# EAGLE board tc08n (EAGLE 6.6.0)
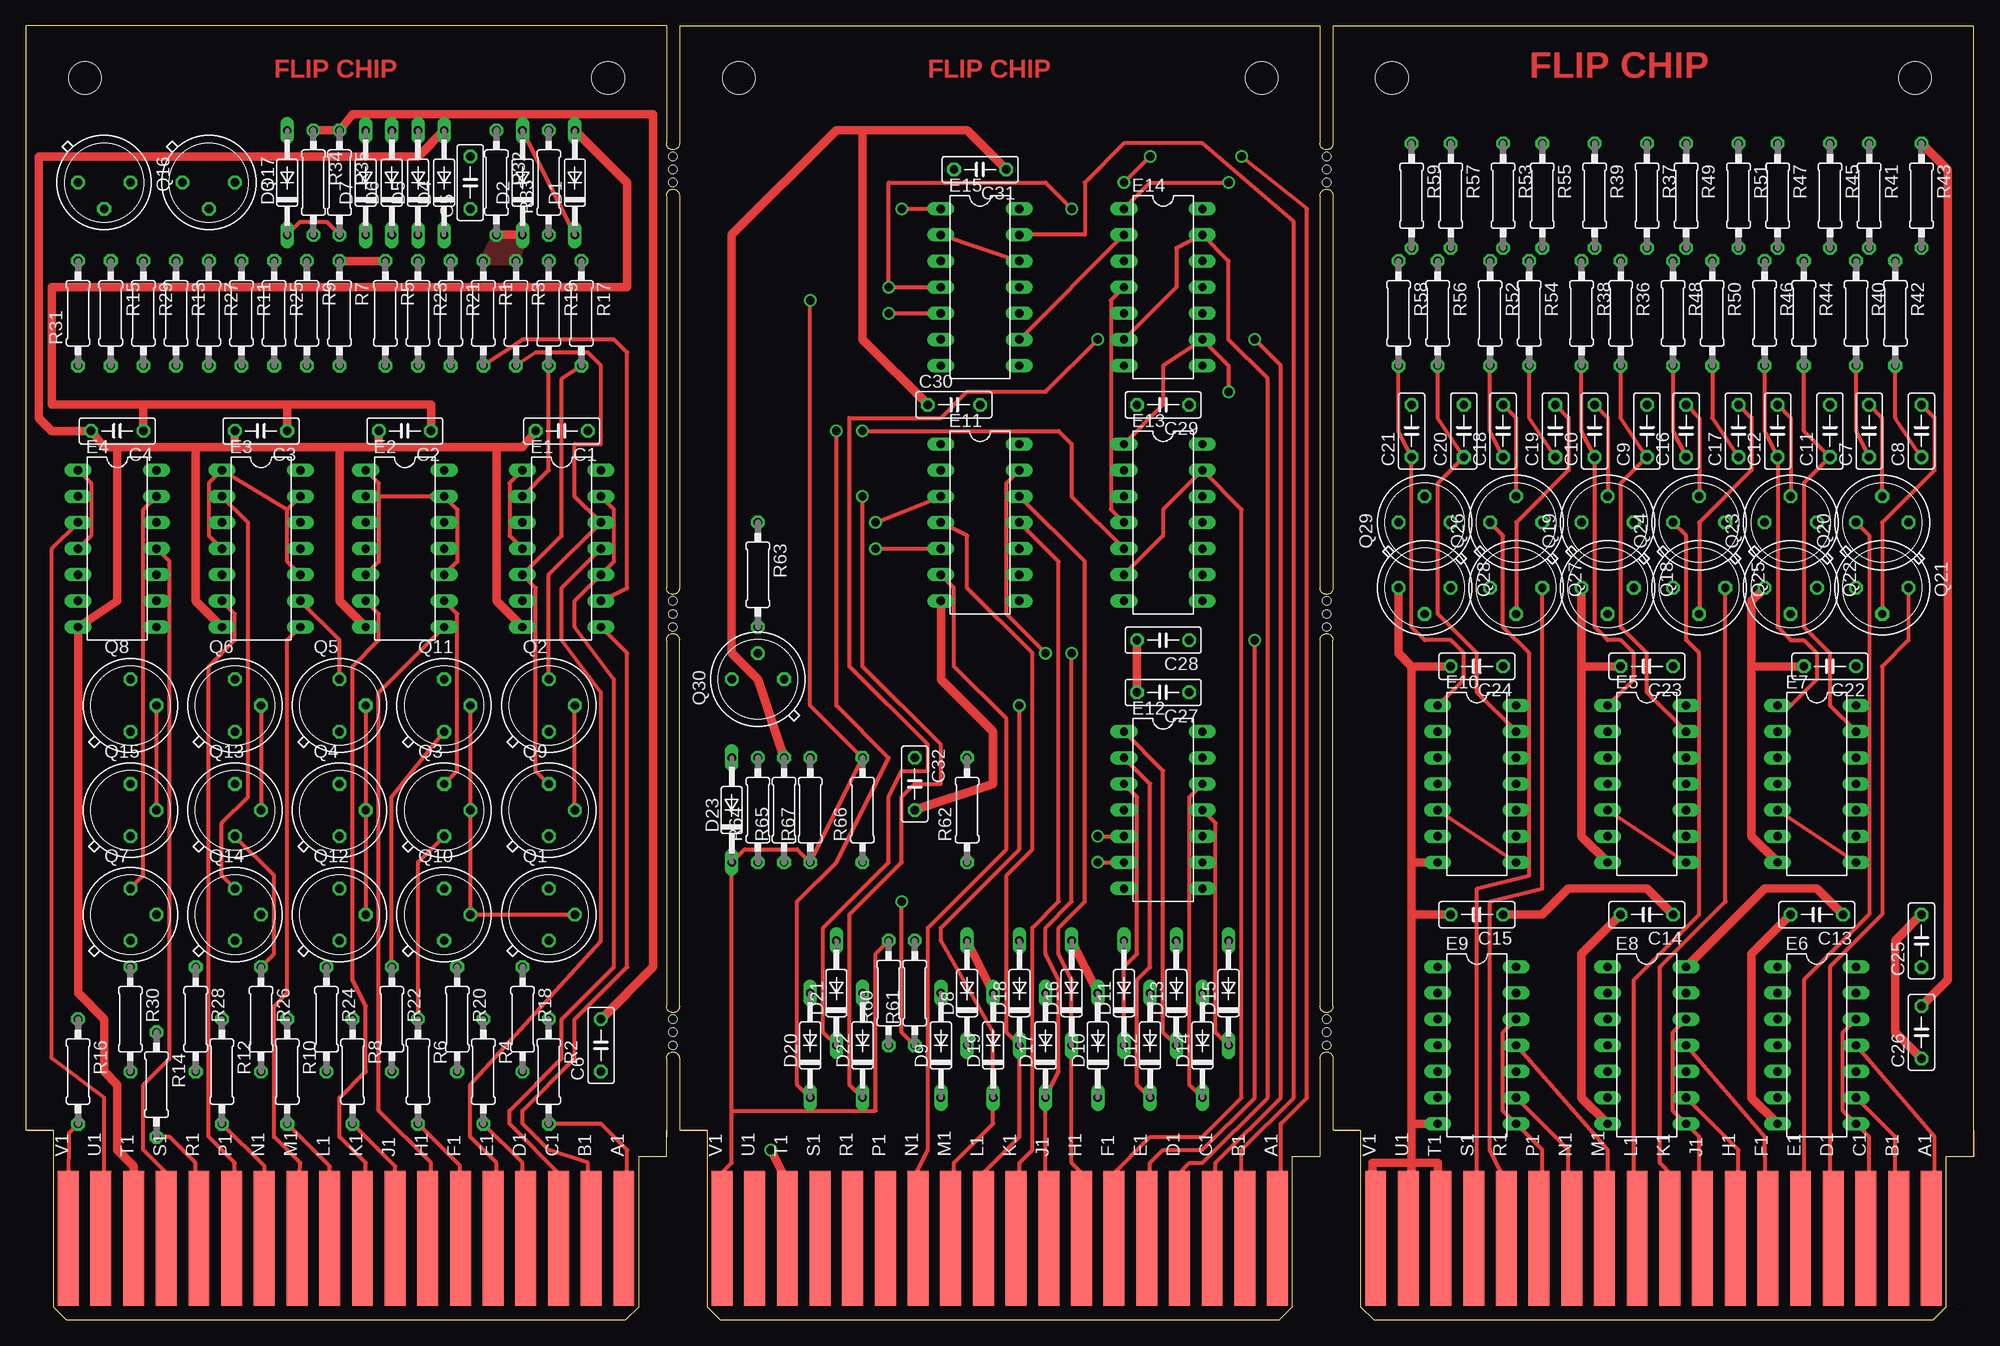
[diagram p0: board, top side]
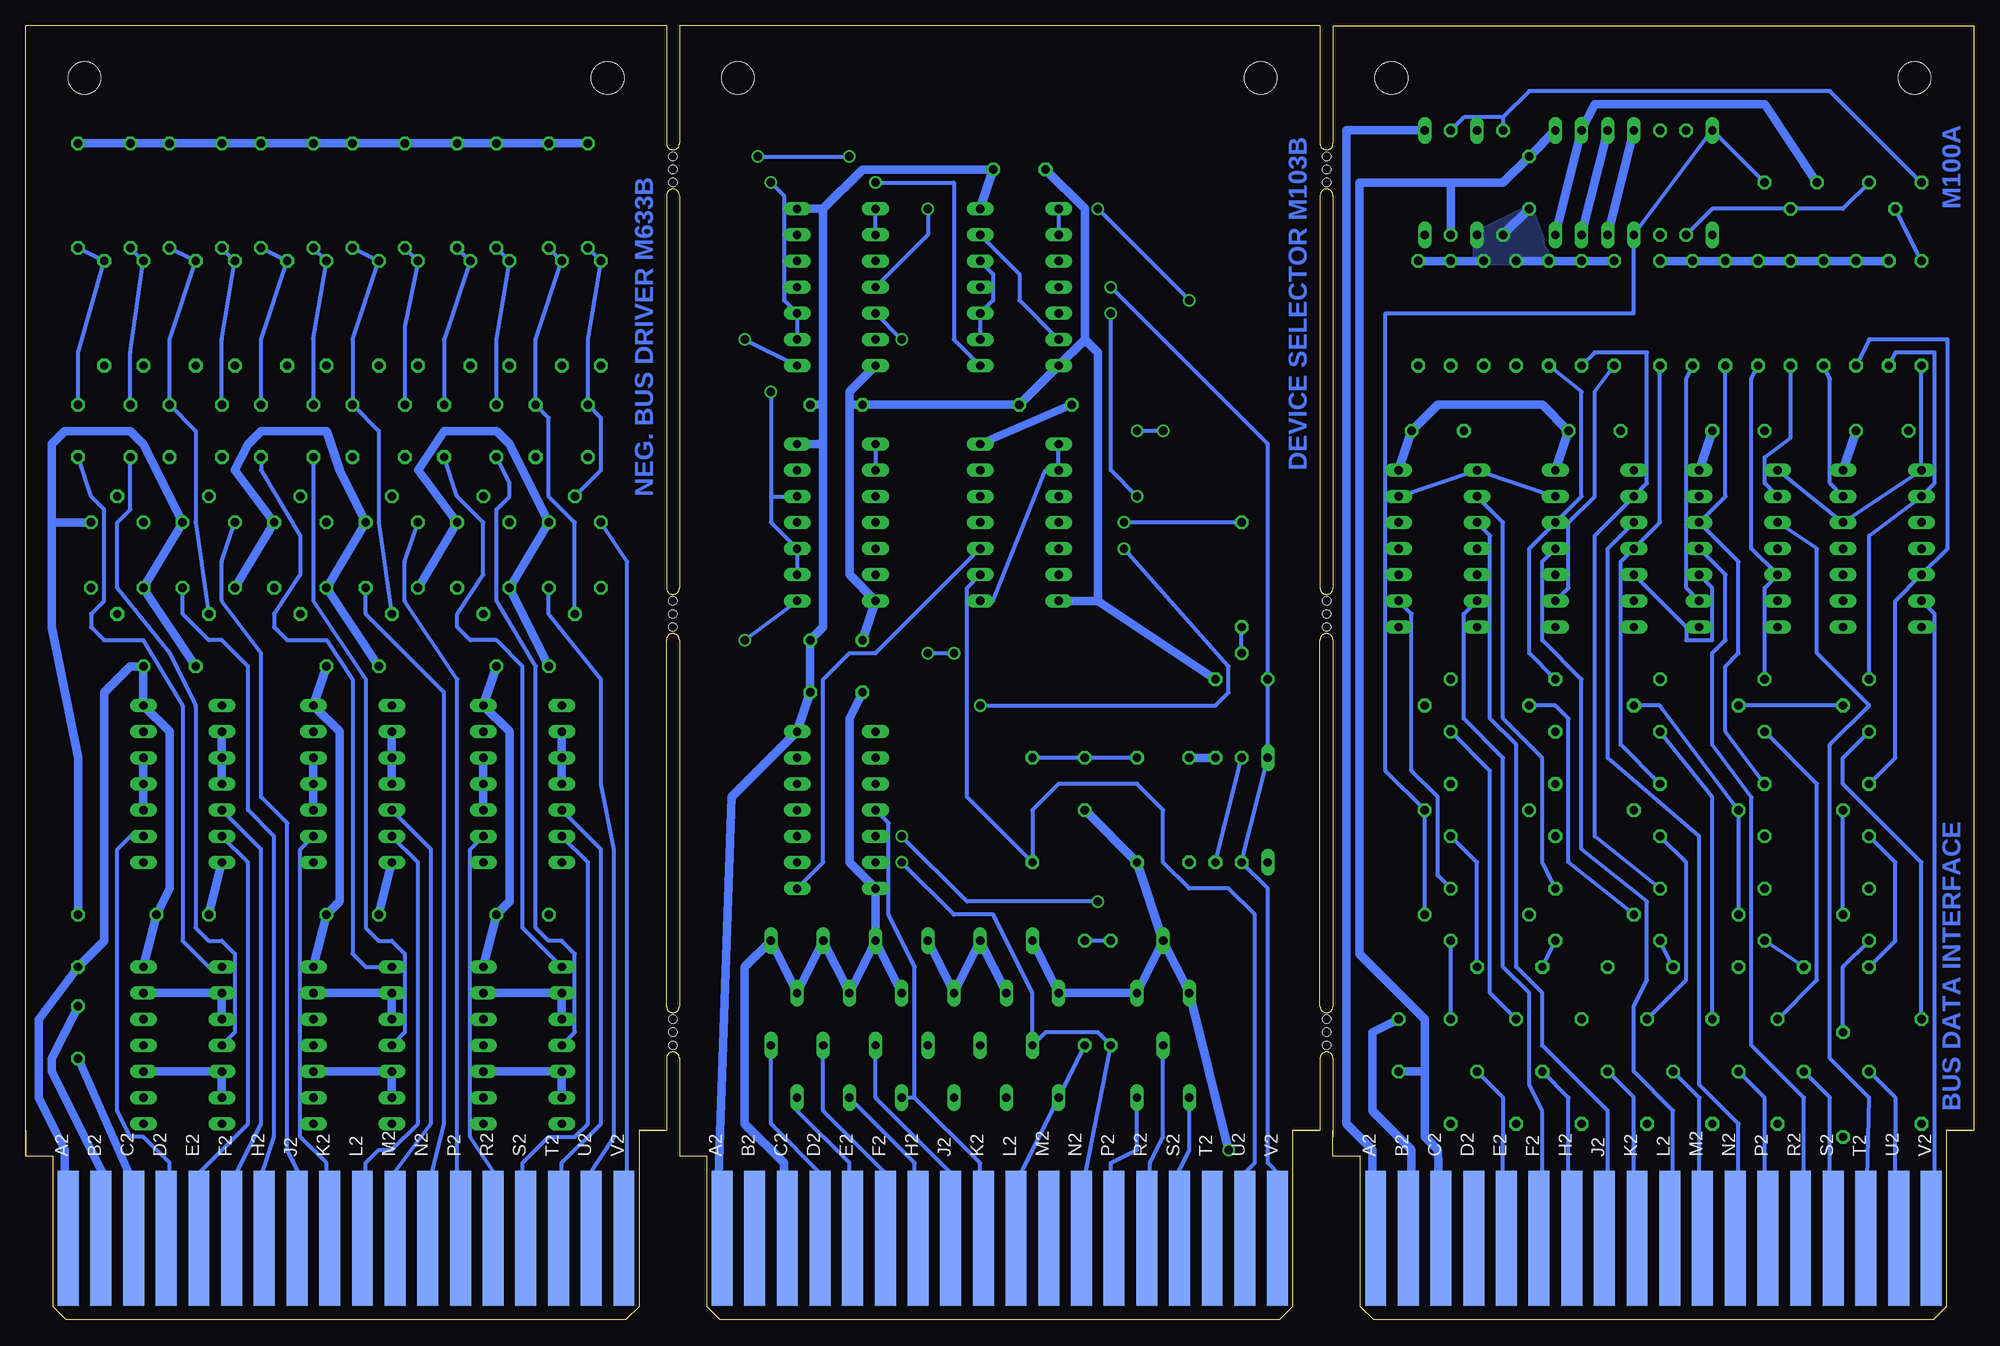
[diagram p1: board, bottom side, seen from below]

Size 189.23 x 125.73 mm. Coordinates in mm from the lower left corner, seen from the top.
Copper layers (1+16): Top 0.035mm / dielectric 1.5mm / Bottom 0.035mm
Design rules "16mils": minimum track width 16mil, minimum drill 32mil, track to track 15mil, track to pad 10mil, pad to pad 10mil, via to via 10mil, smd to smd 10mil, copper to edge 13mil, drill to drill 10mil, minimum pad ring 10mil, minimum via ring 8mil, stop-mask expansion 0mil, vias tented up to drill 0mil, thermal gap 10mil
Net classes: 1 Supply: width 0.813 mm

## Footprints (pad centres in the part's own frame; a part is rotated, then mirrored left to right if it is on the bottom)
C050-025X075 = drill 0.813 octagon: 1 -2.54,0; 2 2.54,0
DO35-10 = drill 0.813 long: A 5.08,0; C -5.08,0
DIL14 = drill 0.813 long: 1 -7.62,-3.81; 2 -5.08,-3.81; 3 -2.54,-3.81; 4 0,-3.81; 5 2.54,-3.81; 6 5.08,-3.81; 7 7.62,-3.81; 8 7.62,3.81; 9 5.08,3.81; 10 2.54,3.81; 11 0,3.81; 12 -2.54,3.81; 13 -5.08,3.81; 14 -7.62,3.81
DECPROTO = hole 3.175: 183.515,120.65; 132.715,120.65; 69.266,120.65; 120.066,120.65; 56.566,120.65; 5.766,120.65 | hole 0.813: 62.865,69.85; 62.865,68.58; 62.865,67.31; 62.865,26.67; 62.865,27.94; 62.865,29.21; 62.865,113.03; 62.865,110.49; 62.865,111.76; 126.365,69.85; 126.365,68.58; 126.365,67.31; 126.365,26.67; 126.365,27.94; 126.365,29.21; 126.365,113.03; 126.365,110.49; 126.365,111.76
TO5 = drill 0.813 octagon: 1 0,-2.54; 2 2.54,0; 3 0,2.54
TO39 = drill 0.813 octagon: 1 0,-2.54; 2 2.54,0; 3 0,2.54
0207/10 = drill 0.813 octagon: 1 -5.08,0; 2 5.08,0
EDGE-CON2 = smd 13.106 x 2.032: A1 7.938,4.128; B1 7.938,7.303; C1 7.938,10.477; D1 7.938,13.652; E1 7.938,16.828; F1 7.938,20.003; H1 7.938,23.177; J1 7.938,26.352; K1 7.938,29.527; L1 7.938,32.703; M1 7.938,35.877; N1 7.938,39.053; P1 7.938,42.227; R1 7.938,45.403; S1 7.938,48.578; T1 7.938,51.752; U1 7.938,54.928; V1 7.938,58.102 | smd 13.106 x 2.032 bottom: A2 7.938,4.128; B2 7.938,7.303; C2 7.938,10.477; D2 7.938,13.652; E2 7.938,16.828; F2 7.938,20.003; H2 7.938,23.177; J2 7.938,26.352; K2 7.938,29.527; L2 7.938,32.703; M2 7.938,35.877; N2 7.938,39.053; P2 7.938,42.227; R2 7.938,45.403; S2 7.938,48.578; T2 7.938,51.752; U2 7.938,54.928; V2 7.938,58.102

## Placement (x,y rotation side)
C1  .01uf  [C050-025X075]  52.07,86.36 180 top
C2  .01uf  [C050-025X075]  36.83,86.36 180 top
C3  .01uf  [C050-025X075]  22.86,86.36 180 top
C4  .01uf  [C050-025X075]  8.89,86.36 180 top
C5  .01uf  [C050-025X075]  43.18,110.49 90 top
C6  .01uf  [C050-025X075]  55.88,26.67 90 top
C7  15pF  [C050-025X075]  179.07,86.36 90 top
C8  15pF  [C050-025X075]  184.15,86.36 90 top
C9  15pF  [C050-025X075]  157.48,86.36 90 top
C10  15pF  [C050-025X075]  152.4,86.36 90 top
C11  15pF  [C050-025X075]  175.26,86.36 90 top
C12  15pF  [C050-025X075]  170.18,86.36 90 top
C13  .01uF  [C050-025X075]  173.99,39.37 180 top
C14  .01uF  [C050-025X075]  157.48,39.37 180 top
C15  .01uF  [C050-025X075]  140.97,39.37 180 top
C16  15pF  [C050-025X075]  161.29,86.36 90 top
C17  15pF  [C050-025X075]  166.37,86.36 90 top
C18  15pF  [C050-025X075]  143.51,86.36 90 top
C19  15pF  [C050-025X075]  148.59,86.36 90 top
C20  15pF  [C050-025X075]  139.7,86.36 90 top
C21  15pF  [C050-025X075]  134.62,86.36 90 top
C22  .01uF  [C050-025X075]  175.26,63.5 180 top
C23  .01uF  [C050-025X075]  157.48,63.5 180 top
C24  .01uF  [C050-025X075]  140.97,63.5 180 top
C25  .01uF  [C050-025X075]  184.15,36.83 90 top
C26  .01uF  [C050-025X075]  184.15,27.94 90 top
C27  .01uf  [C050-025X075]  110.49,60.96 180 top
C28  .01uf  [C050-025X075]  110.49,66.04 180 top
C29  .01uf  [C050-025X075]  110.49,88.9 180 top
C30  .01uf  [C050-025X075]  90.17,88.9 0 top
C31  .01uf  [C050-025X075]  92.71,111.76 180 top
C32  .01uf  [C050-025X075]  86.36,52.07 270 top
D1  1N914  [DO35-10]  53.34,110.49 90 top
D2  1N914  [DO35-10]  48.26,110.49 90 top
D3  1N4154  [DO35-10]  25.4,110.49 90 top
D4  1N914  [DO35-10]  40.64,110.49 90 top
D5  1N914  [DO35-10]  38.1,110.49 90 top
D6  1N914  [DO35-10]  35.56,110.49 90 top
D7  1N914  [DO35-10]  33.02,110.49 90 top
D8  1N4154  [DO35-10]  91.44,31.75 90 top
D9  1N4154  [DO35-10]  88.9,26.67 90 top
D10  1N4154  [DO35-10]  104.14,26.67 90 top
D11  1N4154  [DO35-10]  106.68,31.75 90 top
D12  1N4154  [DO35-10]  109.22,26.67 90 top
D13  1N4154  [DO35-10]  111.76,31.75 90 top
D14  1N4154  [DO35-10]  114.3,26.67 90 top
D15  1N4154  [DO35-10]  116.84,31.75 90 top
D16  1N4154  [DO35-10]  101.6,31.75 90 top
D17  1N4154  [DO35-10]  99.06,26.67 90 top
D18  1N4154  [DO35-10]  96.52,31.75 90 top
D19  1N4154  [DO35-10]  93.98,26.67 90 top
D20  1N4154  [DO35-10]  76.2,26.67 90 top
D21  1N4154  [DO35-10]  78.74,31.75 90 top
D22  1N4154  [DO35-10]  81.28,26.67 90 top
D23  1N4154  [DO35-10]  68.58,49.53 90 top
E1  7400N  [DIL14]  52.07,74.93 270 top
E2  7400N  [DIL14]  36.83,74.93 270 top
E3  7400N  [DIL14]  22.86,74.93 270 top
E4  7400N  [DIL14]  8.89,74.93 270 top
E5  7402N  [DIL14]  157.48,52.07 270 top
E6  7402N  [DIL14]  173.99,26.67 270 top
E7  7402N  [DIL14]  173.99,52.07 270 top
E8  7402N  [DIL14]  157.48,26.67 270 top
E9  7402N  [DIL14]  140.97,26.67 270 top
E10  7402N  [DIL14]  140.97,52.07 270 top
E11  7400N  [DIL14]  92.71,77.47 270 top
E12  7430N  [DIL14]  110.49,49.53 270 top
E13  74H40N  [DIL14]  110.49,77.47 270 top
E14  74H40N  [DIL14]  110.49,100.33 270 top
E15  74H40N  [DIL14]  92.71,100.33 270 top
E$1  [DECPROTO]  0,0 0 top
Q1  PN3569  [TO5]  50.8,39.37 0 top
Q2  PN3569  [TO5]  50.8,59.69 0 top
Q3  PN3569  [TO5]  40.64,49.53 0 top
Q4  PN3569  [TO5]  30.48,49.53 0 top
Q5  PN3569  [TO5]  30.48,59.69 0 top
Q6  PN3569  [TO5]  20.32,59.69 0 top
Q7  PN3569  [TO5]  10.16,39.37 0 top
Q8  PN3569  [TO5]  10.16,59.69 0 top
Q9  PN3569  [TO5]  50.8,49.53 0 top
Q10  PN3569  [TO5]  40.64,39.37 0 top
Q11  PN3569  [TO5]  40.64,59.69 0 top
Q12  PN3569  [TO5]  30.48,39.37 0 top
Q13  PN3569  [TO5]  20.32,49.53 0 top
Q14  PN3569  [TO5]  20.32,39.37 0 top
Q15  PN3569  [TO5]  10.16,49.53 0 top
Q16  MPS6534  [TO5]  7.62,110.49 270 top
Q17  MPS6534  [TO5]  17.78,110.49 270 top
Q18  PN3640  [TO39]  153.67,71.12 270 top
Q19  PN3640  [TO39]  153.67,77.47 90 top
Q20  PN3640  [TO39]  180.34,77.47 90 top
Q21  PN3640  [TO39]  180.34,71.12 270 top
Q22  PN3640  [TO39]  171.45,71.12 270 top
Q23  PN3640  [TO39]  171.45,77.47 90 top
Q24  PN3640  [TO39]  162.56,77.47 90 top
Q25  PN3640  [TO39]  162.56,71.12 270 top
Q26  PN3640  [TO39]  144.78,77.47 90 top
Q27  PN3640  [TO39]  144.78,71.12 270 top
Q28  PN3640  [TO39]  135.89,71.12 270 top
Q29  PN3640  [TO39]  135.89,77.47 90 top
Q30  PN3569  [TO39]  71.12,62.23 90 top
R1  4700  [0207/10]  44.45,97.79 270 top
R2  470  [0207/10]  50.8,24.13 270 top
R3  4700  [0207/10]  47.62,97.79 270 top
R4  470  [0207/10]  44.45,24.13 270 top
R5  4700  [0207/10]  34.92,97.79 270 top
R6  470  [0207/10]  38.1,24.13 270 top
R7  4700  [0207/10]  30.48,97.79 270 top
R8  470  [0207/10]  31.75,24.13 270 top
R9  4700  [0207/10]  27.3,97.79 270 top
R10  470  [0207/10]  25.4,24.13 270 top
R11  4700  [0207/10]  20.95,97.79 270 top
R12  470  [0207/10]  19.05,24.13 270 top
R13  4700  [0207/10]  14.61,97.79 270 top
R14  470  [0207/10]  12.7,22.86 270 top
R15  4700  [0207/10]  8.26,97.79 270 top
R16  470  [0207/10]  5.08,24.13 270 top
R17  4700  [0207/10]  53.98,97.79 270 top
R18  470  [0207/10]  48.26,29.21 270 top
R19  4700  [0207/10]  50.8,97.79 270 top
R20  470  [0207/10]  41.91,29.21 270 top
R21  4700  [0207/10]  41.27,97.79 270 top
R22  470  [0207/10]  35.56,29.21 270 top
R23  4700  [0207/10]  38.1,97.79 270 top
R24  470  [0207/10]  29.21,29.21 270 top
R25  4700  [0207/10]  24.13,97.79 270 top
R26  470  [0207/10]  22.86,29.21 270 top
R27  4700  [0207/10]  17.78,97.79 270 top
R28  470  [0207/10]  16.51,29.21 270 top
R29  4700  [0207/10]  11.43,97.79 270 top
R30  470  [0207/10]  10.16,29.21 270 top
R31  1000  [0207/10]  5.08,97.79 90 top
R32  100  [0207/10]  45.72,110.49 270 top
R33  220  [0207/10]  50.8,110.49 90 top
R34  2200  [0207/10]  27.94,110.49 270 top
R35  4700  [0207/10]  30.48,110.49 270 top
R36  1k  [0207/10]  154.94,97.79 270 top
R37  5.6K  [0207/10]  157.48,109.22 270 top
R38  1k  [0207/10]  151.13,97.79 270 top
R39  5.6K  [0207/10]  152.4,109.22 270 top
R40  1k  [0207/10]  177.8,97.79 270 top
R41  5.6K  [0207/10]  179.07,109.22 270 top
R42  1k  [0207/10]  181.61,97.79 270 top
R43  5.6K  [0207/10]  184.15,109.22 270 top
R44  1k  [0207/10]  172.72,97.79 270 top
R45  5.6K  [0207/10]  175.26,109.22 270 top
R46  1k  [0207/10]  168.91,97.79 270 top
R47  5.6K  [0207/10]  170.18,109.22 270 top
R48  1k  [0207/10]  160.02,97.79 270 top
R49  5.6K  [0207/10]  161.29,109.22 270 top
R50  1k  [0207/10]  163.83,97.79 270 top
R51  5.6K  [0207/10]  166.37,109.22 270 top
R52  1k  [0207/10]  142.24,97.79 270 top
R53  5.6K  [0207/10]  143.51,109.22 270 top
R54  1k  [0207/10]  146.05,97.79 270 top
R55  5.6K  [0207/10]  147.32,109.22 270 top
R56  1k  [0207/10]  137.16,97.79 270 top
R57  5.6K  [0207/10]  138.43,109.22 270 top
R58  1k  [0207/10]  133.35,97.79 270 top
R59  5.6K  [0207/10]  134.62,109.22 270 top
R60  8.2K  [0207/10]  83.82,31.75 90 top
R61  8.2K  [0207/10]  86.36,31.75 90 top
R62  8.2K  [0207/10]  91.44,49.53 90 top
R63  750  [0207/10]  71.12,72.39 270 top
R64  750  [0207/10]  71.12,49.53 90 top
R65  750  [0207/10]  73.66,49.53 90 top
R66  750  [0207/10]  81.28,49.53 90 top
R67  330  [0207/10]  76.2,49.53 90 top
U$1  [EDGE-CON2]  62.23,0 90 top
U$4  [EDGE-CON2]  189.23,0 90 top
U$5  [FLIPCHIP]  127,125.73 270 top
U$8  [EDGE-CON2]  125.73,0 90 top

## Library data of the parts
C1-C32 R1-R67 = rcl
D1-D23 = diode
E1-E15 = 74xx-us
E$1 U$1 U$4 U$5 U$8 = dec-con
Q1-Q17 Q30 = transistor
Q18-Q29 = transistor-pnp

## Nets
+2V: Q16.1 R32.1 R33.2
+3V: C5.1 D2.C R1.1 R3.1 R5.1 R7.1 R9.1 R11.1 R13.1 R15.1 R17.1 R19.1 R21.1 R23.1 R25.1 R27.1 R29.1 R32.2
+3V3: C32.1 D23.C E13.1 E13.2 E13.9 E13.10 E13.12 E14.1 E14.2 E14.9 E14.10 E14.12 E15.1 E15.2 E15.9 E15.10 E15.12 R60.2 R61.2 R62.2 R66.2 R67.1 U$8.V1
-15V: C6.2 R34.1 R35.1 U$1.B2
-15V1: C26.2 R37.1 R39.1 R41.1 R43.1 R45.1 R47.1 R49.1 R51.1 R53.1 R55.1 R57.1 R59.1 U$4.B2
A1: E15.8 U$8.A1
B1: E15.6 E15.13 U$8.B1
C1: E14.8 U$8.C1
D1: E14.6 E14.13 U$8.D1
D2: D15.C E12.11 U$8.D2
E1: E13.8 U$8.E1
E2: D14.C E12.12 U$8.E2
F1: E13.6 E13.13 U$8.F1
F2: D13.C E12.1 U$8.F2
GND [Supply]: C1.2 C2.2 C3.2 C4.2 C5.2 C6.1 D4.A E1.7 E2.7 E3.7 E4.7 R33.1 U$1.C2 U$1.T1
GND1 [Supply]: C13.2 C14.2 C15.2 C22.2 C23.2 C24.2 C25.2 C26.1 E5.7 E6.7 E7.7 E8.7 E9.7 E10.7 Q18.1 Q19.1 Q20.1 Q21.1 Q22.1 Q23.1 Q24.1 Q25.1 Q26.1 Q27.1 Q28.1 Q29.1 U$4.C2 U$4.T1 U$4.U1 U$4.V1
GND2: C27.2 C28.2 C29.2 C30.2 C31.2 C32.2 D8.A D9.A D10.A D11.A D12.A D13.A D14.A D15.A D16.A D17.A D18.A D19.A D20.A D21.A D22.A E11.7 E12.7 E13.7 E14.7 E15.7 Q30.1 R66.1 U$8.C2 U$8.T1
H1: D16.C E11.12 U$8.H1
H2: D12.C E12.2 U$8.H2
J1: D17.C E11.13 U$8.J1
J2: D11.C E12.3 U$8.J2
K1: E11.11 U$8.K1
K2: D10.C E12.4 U$8.K2
L1: D18.C E11.4 U$8.L1
L2: D9.C E12.5 R61.1 U$8.L2
M1: D19.C E11.5 U$8.M1
N1: E11.6 U$8.N1
N2: D8.C E12.6 R60.1 U$8.N2
N$1: Q1.1 R2.1
N$2: E1.9 Q1.3 R1.2
N$3: E5.10 E5.11 E5.12
N$4: E1.1 E1.4 E1.10 E1.13 E2.1 E2.5 E2.10 E2.13 E3.1 E3.4 E3.10 E3.13 E4.1 E4.4 E4.12 R31.1 U$1.C1
N$5: E1.12 Q2.3 R3.2
N$6: E1.8 U$1.B1
N$7: Q2.1 R4.1
N$8: R4.2 U$1.D1
N$9: E1.11 U$1.E1
N$10: R6.2 U$1.F1
N$11: Q3.1 R6.1
N$12: E2.9 Q3.3 R5.2
N$13: E2.8 U$1.H1
N$14: R8.2 U$1.J1
N$15: Q4.1 R8.1
N$16: E2.4 Q4.3 R7.2
N$17: E2.6 U$1.K1
N$18: R10.2 U$1.L1
N$19: E3.8 U$1.M1
N$20: E3.9 Q5.3 R9.2
N$21: Q5.1 R10.1
N$22: D3.A D7.C Q1.2 Q2.2 Q3.2 Q4.2 Q5.2 Q6.2 Q7.2 Q8.2 Q9.2 Q10.2 Q11.2 Q12.2 Q13.2 Q14.2 Q15.2 Q17.3
N$23: R12.2 U$1.N1
N$24: Q6.1 R12.1
N$25: E3.5 Q6.3 R11.2
N$26: E3.6 U$1.P1
N$27: E4.11 U$1.S1
N$28: Q7.1 R14.1
N$29: R14.2 U$1.R1
N$30: E4.13 Q7.3 R13.2
N$31: E4.3 U$1.U1
N$32: R16.2 U$1.V1
N$33: R2.2 U$1.A1
N$34: E4.2 Q8.3 R15.2
N$35: R18.2 U$1.E2
N$36: E1.6 U$1.F2
N$37: R20.2 U$1.H2
N$38: Q8.1 R16.1
N$39: Q9.1 R18.1
N$40: E1.5 Q9.3 R17.2
N$41: E1.3 U$1.J2
N$42: R22.2 U$1.K2
N$43: E1.2 Q10.3 R19.2
N$44: Q10.1 R20.1
N$45: Q11.1 R22.1
N$46: E2.12 Q11.3 R21.2
N$47: E2.11 U$1.L2
N$48: R24.2 U$1.M2
N$49: Q12.1 R24.1
N$50: E2.3 U$1.N2
N$51: E2.2 Q12.3 R23.2
N$52: R26.2 U$1.P2
N$53: E3.11 U$1.R2
N$54: E3.12 Q13.3 R25.2
N$55: R28.2 U$1.S2
N$56: E3.3 U$1.T2
N$57: R30.2 U$1.U2
N$58: Q13.1 R26.1
N$59: Q14.1 R28.1
N$60: E3.2 Q14.3 R27.2
N$61: E4.6 U$1.V2
N$62: D1.C D2.A
N$63: E4.5 Q15.3 R29.2
N$64: Q15.1 R30.1
N$65: D3.C R35.2
N$66: D5.C D6.A
N$67: D6.C D7.A
N$68: Q16.2 R31.2
N$69: Q16.3 Q17.2 R34.2
N$70: D4.C D5.A Q17.1
N$71: C9.1 E5.13 R36.2
N$72: C9.2 Q18.2 R36.1 R37.2
N$73: E5.2 E5.3 E5.4
N$74: C10.1 E5.1 R38.2
N$75: C10.2 Q19.2 R38.1 R39.2
N$76: E5.5 E5.8 U$4.M2
N$77: E5.9 U$4.K2
N$78: E5.6 U$4.L2
N$79: Q19.3 U$4.P2
N$80: Q18.3 U$4.N2
N$81: E6.5 E6.6 E6.10
N$82: C7.1 E6.4 R40.2
N$83: C7.2 Q20.2 R40.1 R41.2
N$84: E6.2 E6.3 E6.13
N$85: C8.1 E6.1 R42.2
N$86: C8.2 Q21.2 R42.1 R43.2
N$87: E6.8 E6.12 U$4.C1
N$88: E6.9 U$4.B1
N$89: E6.11 U$4.A1
N$90: Q21.3 U$4.D1
N$91: Q20.3 U$4.E1
N$92: E7.10 E7.11 E7.12
N$93: C11.1 E7.13 R44.2
N$94: C11.2 Q22.2 R44.1 R45.2
N$95: E7.2 E7.3 E7.4
N$96: C12.1 E7.1 R46.2
N$97: C12.2 Q23.2 R46.1 R47.2
N$98: E7.5 E7.8 U$4.F2
N$99: E7.9 U$4.D2
N$100: E7.6 U$4.E2
N$101: Q23.3 U$4.J2
N$102: Q22.3 U$4.H2
N$103: E8.5 E8.6 E8.10
N$104: C16.1 E8.4 R48.2
N$105: C16.2 Q24.2 R48.1 R49.2
N$106: E8.2 E8.3 E8.13
N$107: C17.1 E8.1 R50.2
N$108: C17.2 Q25.2 R50.1 R51.2
N$109: E8.8 E8.12 U$4.J1
N$110: E8.9 U$4.H1
N$111: E8.11 U$4.F1
N$112: Q25.3 U$4.K1
N$113: Q24.3 U$4.L1
N$114: E9.5 E9.6 E9.10
N$115: C18.1 E9.4 R52.2
N$116: C18.2 Q26.2 R52.1 R53.2
N$117: E9.2 E9.3 E9.13
N$118: C19.1 E9.1 R54.2
N$119: C19.2 Q27.2 R54.1 R55.2
N$120: E9.8 E9.12 U$4.P1
N$121: E9.9 U$4.N1
N$122: E9.11 U$4.M1
N$123: Q27.3 U$4.R1
N$124: Q26.3 U$4.S1
N$125: E10.10 E10.11 E10.12
N$126: C20.1 E10.13 R56.2
N$127: C20.2 Q28.2 R56.1 R57.2
N$128: E10.2 E10.3 E10.4
N$129: C21.1 E10.1 R58.2
N$130: C21.2 Q29.2 R58.1 R59.2
N$131: E10.5 E10.8 U$4.T2
N$132: E10.9 U$4.R2
N$133: E10.6 U$4.S2
N$134: Q29.3 U$4.V2
N$135: Q28.3 U$4.U2
N$136: E11.10 E12.8
N$137: E11.1 E11.2 E11.8
N$138: E11.3 R63.1
N$139: Q30.2 R63.2
N$140: R64.2 R65.1
P2: D22.C E15.5 U$8.P2
R2: D21.C E14.5 U$8.R2
S2: D20.C E13.5 U$8.S2
U2: E11.9 R62.1 U$8.U2
V2: D23.A E13.4 E14.4 E15.4 Q30.3 R64.1 U$8.V2
VCC [Supply]: C1.1 C2.1 C3.1 C4.1 D1.A E1.14 E2.14 E3.14 E4.14 U$1.A2
VCC1 [Supply]: C13.1 C14.1 C15.1 C22.1 C23.1 C24.1 C25.1 E5.14 E6.14 E7.14 E8.14 E9.14 E10.14 U$4.A2
VCC3: C27.1 C28.1 C29.1 C30.1 C31.1 E11.14 E12.14 E13.14 E14.14 E15.14 R65.2 R67.2 U$8.A2

## Tracks (layer width: path | path; a pad name or v marks a point on that pad's centre or on a via)
+2V
  Bottom 0.406: Q16.1 13.97,119.38 43.18,119.38 45.72,116.84 | 45.72,116.84 R32.1 | R33.2 49.53,116.84 45.72,116.84
+3V
  Top 0.813: R32.2 D2.C | R7.1 R5.1
  Bottom 0.813: R15.1 R29.1 R13.1 R27.1 R11.1 R25.1 R9.1 R7.1 | C5.1 R32.2 | R17.1 R19.1 R3.1 | R1.1 R21.1 R23.1 R5.1
  pour Top (no thermals): 48.26,105.41 47.62,102.87 44.45,102.87 45.72,105.41
  pour Bottom (no thermals): 43.18,107.95 41.27,102.87 48.26,102.87 48.26,105.41
+3V3  (via drill 0.81)
  Top 0.406: U$8.V1 67.31,13.97 68.58,15.24 68.58,20.32 | 68.58,20.32 D23.C 69.85,45.72 74.93,45.72 R67.1 R66.2 76.2,59.69 v76.2,99.06 | R60.2 82.55,35.56 82.55,20.32 68.58,20.32 | E15.9 E14.2 | v116.84,110.49 109.22,110.49 E14.1 | v85.09,107.95 E15.1 | E15.2 E15.12 | v116.84,90.17 116.84,92.71 E14.9 110.49,92.71 110.49,88.9 E13.1
  Bottom 0.406: R66.2 C32.1 R62.2 | R60.2 R61.2 | E13.1 E13.2 | E14.9 E14.10 115.57,99.06 115.57,102.87 | 115.57,102.87 E14.12 | 115.57,102.87 115.57,109.22 v116.84,110.49 | E14.2 E14.1 | E15.9 E15.10 95.25,99.06 95.25,101.6 E15.12 | E15.1 E15.2 | v76.2,99.06 v85.09,107.95 | v116.84,90.17 116.84,80.01 | 116.84,80.01 E13.12 | 116.84,80.01 116.84,77.47 E13.10 E13.9
-15V
  Top 0.813: R34.1 R35.1 31.75,117.16 60.96,117.16 60.96,34.29 C6.2
  Bottom 0.813: U$1.B2 54.61,13.97 54.61,16.51 58.42,20.32 58.42,27.94 C6.2
-15V1
  Top 0.813: C26.2 186.69,33.02 186.69,111.76 R43.1
  Bottom 0.813: U$4.B2 181.61,8.89 181.61,13.97 186.69,24.13 186.69,25.4 C26.2 | R43.1 R41.1 R47.1 R45.1 R51.1 R49.1 R39.1 R37.1 R55.1 R53.1 R59.1 R57.1
A1  (via drill 0.81)
  Top 0.406: U$8.A1 121.52,13.97 121.92,13.97 121.92,19.05 124.46,21.59 124.46,107.95 v118.11,113.03 | v109.22,113.03 v106.68,110.49
  Bottom 0.406: v118.11,113.03 v109.22,113.03 | E15.8 99.06,95.25 99.06,110.49 v106.68,110.49
B1
  Top 0.406: U$8.B1 118.4,13.68 118.11,13.97 118.11,16.51 123.19,21.59 123.19,106.68 114.3,114.3 106.68,114.3 102.87,110.49 102.87,105.41 E15.13
  Bottom 0.406: E15.6 92.71,99.06 92.71,101.6 E15.13
C1  (via drill 0.81)
  Top 0.406: U$8.C1 115.24,13.64 115.57,13.97 115.57,15.24 121.92,21.59 121.92,92.71 v119.38,95.25
  Bottom 0.406: v119.38,95.25 E14.8
D1
  Top 0.406: U$8.D1 112.06,13.67 111.76,13.97 113.03,15.24 114.3,15.24 120.65,21.59 120.65,91.44 116.84,95.25 116.84,102.87 E14.13 111.76,104.14 111.76,100.33 E14.6
D2
  Top 0.406: D15.C 115.57,27.94 115.57,48.26 E12.11
  Bottom 0.406: U$8.D2 111.76,13.97 116.84,19.05 D15.C
E1  (via drill 0.81)
  Top 0.406: U$8.E1 109.22,13.97 109.22,15.24 110.49,16.51 114.3,16.51 119.38,21.59 v119.38,66.04
  Bottom 0.406: v119.38,66.04 E13.8
E2
  Top 0.406: D14.C 113.03,22.86 113.03,50.8 E12.12
  Bottom 0.406: U$8.E2 109.22,13.97 109.22,15.24 114.3,20.32 D14.C
F1
  Top 0.406: U$8.F1 105.41,13.97 109.22,17.78 114.3,17.78 118.11,21.59 118.11,78.74 E13.13 110.49,78.74 110.49,76.2 E13.6
F2
  Top 0.406: D13.C 110.49,27.94 110.49,53.34 E12.1
  Bottom 0.406: U$8.F2 105.41,13.97 111.76,20.32 D13.C
GND
  Top 0.813: U$1.T1 10.16,12.7 10.49,13.03 10.49,14.91 8.89,16.51 8.9,22.85 7.62,24.13 7.62,29.21 5.08,31.75 E4.7 8.89,69.85 8.89,84.77 | 8.89,84.77 7.62,84.77 C4.2 2.54,86.36 1.27,87.63 1.27,113.03 38.1,113.03 D4.A | 8.89,84.77 16.51,84.77 | 16.51,84.77 20.32,84.77 | 20.32,84.77 C3.2 | C1.2 48.26,84.77 45.72,84.77 | 20.32,84.77 30.48,84.77 | 30.48,84.77 34.29,84.77 | 34.29,84.77 45.72,84.77 | 34.29,84.77 C2.2 | E3.7 16.51,69.85 16.51,84.77 | E2.7 30.48,69.85 30.48,84.77 | E1.7 45.72,69.85 45.72,84.77
  Bottom 0.813: U$1.C2 52.07,16.51 53.34,17.78 53.34,24.13 | 53.34,24.13 53.34,29.21 59.69,35.56 59.69,110.49 50.8,110.49 | 53.34,24.13 C6.1 | 50.8,110.49 R33.1 | 50.8,110.49 45.72,110.49 C5.2 D4.A
GND1
  Top 0.813: U$4.V1 130.81,8.89 130.81,15.24 134.62,15.24 | 134.62,15.24 137.16,15.24 137.16,8.89 U$4.T1 | U$4.U1 134.62,8.89 134.62,15.24 | 134.62,19.05 E9.7 | 134.62,19.05 134.62,15.24 | 134.62,44.45 E10.7 | 134.62,44.45 134.62,39.37 | 134.62,39.37 134.62,19.05 | 134.62,39.37 C15.2 | C24.2 134.62,63.5 | 134.62,63.5 134.62,44.45 | Q28.1 133.35,64.77 134.62,63.5 | E8.7 151.13,21.59 151.13,35.56 C14.2 | E6.7 167.64,21.59 167.64,35.56 C13.2 | C23.2 151.13,63.5 | 151.13,63.5 151.13,46.99 E5.7 | 151.13,63.5 Q18.1 | E7.7 167.64,46.99 167.64,63.5 | 167.64,63.5 167.64,69.85 Q22.1 | 167.64,63.5 C22.2 | C26.1 181.61,27.94 181.61,36.83 C25.2
  Bottom 0.813: U$4.C2 179.07,8.89 179.07,13.97 C26.1 | 186.69,77.47 Q20.1 | 186.69,77.47 186.69,67.31 184.15,54.61 C25.2 | 186.69,77.47 186.69,85.09 185.42,86.36 179.07,86.36 177.8,85.09 Q23.1 Q21.1 C22.2 | E7.7 C13.2 | E5.7 C14.2 | C24.2 Q27.1 Q29.1 142.24,85.09 143.51,86.36 148.59,86.36 151.13,82.55 Q26.1 Q18.1 | C23.2 Q25.1 Q19.1 158.75,82.55 160.02,86.36 166.37,86.36 167.64,85.09 168.91,82.55 Q24.1 Q22.1
GND2  (via drill 0.81)
  Top 0.813: D16.A D10.A | D8.A D19.A | U$8.T1 73.66,13.97 v72.39,16.51 | C27.2 C28.2 | C32.2 93.98,52.07 93.98,57.15 88.9,62.23 E11.7
  Bottom 0.813: D11.A D12.A D13.A D14.A D15.A 119.38,34.29 119.38,19.05 115.57,15.24 115.57,13.97 U$8.C2 | D11.A E12.7 109.22,44.45 109.22,58.42 C27.2 | D10.A D11.A | D16.A D17.A D18.A D19.A | D8.A D9.A D22.A D21.A | D21.A D20.A v72.39,16.51 | C32.2 R66.1 D21.A | C31.2 86.36,107.95 86.36,95.25 | 86.36,95.25 E15.7 C30.2 109.22,88.9 | 109.22,88.9 C29.2 | 109.22,88.9 109.22,72.39 E13.7 C28.2 | E14.7 109.22,90.17 109.22,88.9 | 85.09,69.85 Q30.1 | E11.7 85.09,69.85 | 85.09,69.85 85.09,93.98 86.36,95.25
H1
  Top 0.406: U$8.H1 102.87,13.97 101.6,15.24 D16.C 101.6,33.02 100.33,35.56 100.33,38.1 102.87,40.64 102.87,73.66 E11.12
H2
  Top 0.406: D12.C 107.95,22.86 107.95,33.02 109.22,34.29 109.22,52.07 E12.2
  Bottom 0.406: U$8.H2 102.87,13.97 102.87,15.24 D12.C
J1  (via drill 0.81)
  Top 0.406: U$8.J1 99.06,13.97 D17.C 100.33,24.13 100.33,33.02 99.06,35.56 99.06,38.1 101.6,40.64 v101.6,64.77 | E11.13 95.25,81.28 95.25,68.58 v99.06,64.77
  Bottom 0.406: v101.6,64.77 v99.06,64.77
J2
  Top 0.406: D11.C 106.68,34.29 107.95,35.56 107.95,50.8 E12.3
  Bottom 0.406: U$8.J2 99.06,13.97 106.68,21.59 D11.C
K1
  Top 0.406: U$8.K1 96.52,13.97 96.52,15.24 97.79,16.51 97.79,38.1 100.33,40.64 100.33,73.66 E11.11
K2
  Bottom 0.406: U$8.K2 96.52,13.97 96.52,15.24 102.87,21.59 | 102.87,21.59 D10.C | 102.87,21.59 102.87,34.29 105.41,39.37 105.41,48.26 E12.4
L1
  Top 0.406: U$8.L1 92.71,13.97 96.52,17.78 D18.C 95.25,27.94 95.25,43.18 97.79,45.72 97.79,64.77 91.44,71.12 91.44,76.2 E11.4
L2  (via drill 0.81)
  Top 0.406: R61.1 85.09,27.94 v85.09,40.64 | v104.14,46.99 E12.5
  Bottom 0.406: U$8.L2 92.71,13.97 D9.C R61.1 | v85.09,40.64 97.79,40.64 v104.14,46.99
M1  (via drill 0.81)
  Top 0.406: U$8.M1 90.17,13.97 90.17,15.24 93.98,19.05 D19.C 93.98,27.94 88.9,36.83 88.9,38.1 96.52,45.72 v96.52,59.69 | v82.55,74.93 E11.5
  Bottom 0.406: v82.55,74.93 72.39,63.5 72.39,60.96 73.66,59.69 v96.52,59.69
N1
  Top 0.406: U$8.N1 86.36,13.97 87.63,16.51 87.63,38.1 95.25,45.72 95.25,58.42 90.17,63.5 90.17,71.12 E11.6
N2  (via drill 0.81)
  Top 0.406: v104.14,44.45 E12.6
  Bottom 0.406: U$8.N2 86.68,13.97 86.36,13.97 R60.1 85.09,27.94 90.17,27.94 D8.C 91.44,31.75 95.25,39.37 99.06,39.37 v104.14,44.45
N$1
  Bottom 0.406: R2.1 Q1.1
N$2
  Top 0.406: R1.2 48.26,95.25 57.15,95.25 58.42,93.98 58.42,71.12 E1.9
  Bottom 0.406: E1.9 54.61,68.58 54.61,53.34 52.07,50.8 52.07,43.18 Q1.3
N$3
  Bottom 0.813: E5.12 E5.11 E5.10
N$4
  Top 0.406: U$1.C1 52.07,13.97 46.99,19.05 46.99,20.32 52.07,25.4 52.07,29.21 57.15,34.29 57.15,62.23 53.34,67.31 53.34,69.85 E1.10 57.15,73.66 57.15,78.74 E1.13 | E1.1 46.99,81.28 46.99,76.2 E1.4 | E2.10 41.91,73.66 41.91,78.74 E2.13 34.29,80.01 | E3.4 17.78,76.2 17.78,81.28 E3.1 25.4,78.74 | 25.4,78.74 E3.13 | 25.4,78.74 25.4,73.66 E3.10 | E4.1 6.35,81.28 6.35,76.2 E4.4 | E2.1 34.29,81.28 34.29,80.01 | 34.29,80.01 34.29,73.66 E2.5
  Bottom 0.406: E1.13 E1.1 E2.13 | E3.1 E4.12 E4.1 R31.1 | E3.10 25.4,71.12 25.4,66.04 27.94,66.04 27.94,67.31 E2.5
N$5
  Top 0.406: R3.2 49.53,93.98 54.61,93.98 55.88,92.71 55.88,85.09 53.34,85.09 53.34,80.01 E1.12 50.8,72.39 Q2.3
N$6
  Top 0.406: U$1.B1 54.61,13.97 54.61,15.24 50.8,16.51 48.26,19.05 48.26,20.32 53.34,25.4 53.34,29.21 58.42,34.29 58.42,64.77 E1.8
N$7
  Bottom 0.406: R4.1 46.99,31.75 46.99,53.34 Q2.1
N$8
  Top 0.406: U$1.D1 48.56,13.97 48.26,13.97 48.26,15.24 R4.2
N$9
  Top 0.406: U$1.E1 45.72,13.97 45.72,15.24 43.18,17.78 43.18,22.86 55.88,36.83 55.88,60.96 52.07,66.04 52.07,71.12 E1.11
N$10
  Top 0.406: U$1.F1 42.19,14.96 R6.2
N$11
  Top 0.406: R6.1 38.1,44.45 Q3.1
N$12
  Top 0.406: E2.9 41.91,68.58 41.91,53.34 Q3.3
  Bottom 0.406: R5.2 36.83,90.17 36.83,80.01 39.37,77.47 39.37,71.12 E2.9
N$13
  Top 0.406: U$1.H1 39.37,13.97 39.37,15.24 34.29,20.32 34.29,60.96 E2.8
N$14
  Top 0.406: U$1.J1 35.89,14.91 R8.2
N$15
  Bottom 0.406: R8.1 27.94,33.02 27.94,44.45 Q4.1
N$16
  Bottom 0.406: R7.2 30.48,77.47 E2.4 34.29,73.66 34.29,55.88 Q4.3
N$17
  Top 0.406: U$1.K1 33.02,13.97 33.02,15.24 30.48,17.78 30.48,21.59 33.02,24.13 33.02,30.48 31.75,33.02 31.75,63.5 34.29,66.04 34.29,68.58 E2.6
N$18
  Top 0.406: U$1.L1 29.54,14.91 R10.2
N$19
  Top 0.406: U$1.M1 26.67,15.24 24.13,17.78 24.13,30.48 25.4,31.75 25.4,66.04 E3.8
N$20
  Top 0.406: Q5.3 30.48,66.04 E3.9
  Bottom 0.406: R9.2 27.94,91.44 27.94,71.12 E3.9
N$21
  Bottom 0.406: R10.1 25.4,50.8 Q5.1
N$22
  Top 0.406: Q9.2 Q2.2 | Q11.2 Q3.2 Q10.2 Q1.2 | Q12.2 Q4.2 Q5.2 | Q6.2 Q13.2 | Q15.2 Q8.2
  Bottom 0.406: Q17.3 D3.A D7.C 33.02,97.79 57.15,97.79 57.15,53.34 Q9.2 Q1.2 | Q7.2 Q15.2 | Q14.2 Q13.2 30.48,59.69 Q5.2 | Q12.2 39.37,44.45 39.37,58.42 40.64,59.69 Q11.2 | Q8.2 Q6.2
N$23
  Top 0.406: U$1.N1 23.19,14.91 R12.2
N$24
  Bottom 0.406: Q6.1 15.24,52.07 15.24,33.02 R12.1
N$25
  Bottom 0.406: R11.2 21.59,91.44 21.59,74.93 E3.5 20.32,71.12 Q6.3
N$26
  Top 0.406: U$1.P1 19.99,13.64 20.32,13.97 20.32,15.24 17.78,17.78 17.78,63.5 20.32,66.04 20.32,68.58 E3.6
N$27
  Top 0.406: U$1.S1 13.66,14.28 11.43,16.51 11.43,22.86 13.97,25.4 13.97,73.66 E4.11
N$28
  Bottom 0.406: R14.1 12.7,34.29 Q7.1
N$29
  Top 0.406: R14.2 13.97,17.78 16.51,15.24 16.51,8.89 U$1.R1
N$30
  Top 0.406: Q7.3 11.43,43.18 11.43,78.74 E4.13
  Bottom 0.406: R13.2 13.97,91.44 13.97,81.28 E4.13
N$31
  Top 0.406: U$1.U1 7.26,13.61 7.62,13.97 7.62,21.59 2.54,25.4 2.54,74.93 E4.3
N$32
  Top 0.406: U$1.V1 4.2,18.17 R16.2
N$33
  Top 0.406: U$1.A1 58.02,13.97 58.42,13.97 58.42,16.51 55.88,19.05 R2.2
N$34
  Bottom 0.406: Q8.3 10.16,76.2 E4.2 3.81,81.28 3.81,93.98 7.62,93.98 R15.2
N$35
  Bottom 0.406: U$1.E2 45.39,13.64 45.72,13.97 45.71,21.58 R18.2
N$36
  Bottom 0.406: E1.6 49.53,68.58 49.53,58.42 45.72,54.61 45.72,34.29 43.18,31.75 43.18,22.86 41.91,20.32 41.91,13.97 U$1.F2
N$37
  Bottom 0.406: U$1.H2 39.04,13.64 39.37,13.97 39.36,21.58 R20.2
N$38
  Bottom 0.406: R16.1 5.08,44.45 12.7,52.07 12.7,54.61 Q8.1
N$39
  Bottom 0.406: R18.1 48.26,44.45 Q9.1
N$40
  Top 0.406: R17.2 52.07,91.44 52.07,76.2 E1.5 49.53,71.12 49.53,53.34 Q9.3
N$41
  Bottom 0.406: E1.3 46.99,76.2 46.99,58.42 44.45,55.88 44.45,34.29 41.91,31.75 41.91,26.67 35.56,20.32 35.56,13.97 U$1.J2
N$42
  Bottom 0.406: U$1.K2 32.72,13.67 33.02,13.97 33.03,21.6 R22.2
N$43
  Top 0.406: R19.2 50.8,82.55 E1.2
  Bottom 0.406: E1.2 45.72,77.47 45.72,58.42 41.91,54.61 41.91,44.45 Q10.3
N$44
  Bottom 0.406: R20.1 Q10.1
N$45
  Top 0.406: R22.1 35.56,50.8 Q11.1
N$46
  Bottom 0.406: R21.2 38.1,90.17 38.1,80.01 E2.12 43.18,74.93 43.18,64.77 Q11.3
N$47
  Bottom 0.406: E2.11 41.91,73.66 41.91,66.04 38.1,62.23 38.1,45.72 31.75,40.64 31.75,33.02 33.02,30.48 33.02,24.13 29.21,20.32 29.21,13.97 U$1.L2
N$48
  Bottom 0.406: U$1.M2 26.34,13.64 26.67,13.97 26.66,21.58 R24.2
N$49
  Bottom 0.406: R24.1 Q12.1
N$50
  Bottom 0.406: E2.3 35.56,74.93 35.56,54.61 26.67,46.99 26.67,22.86 22.86,19.05 22.86,13.97 U$1.N2
N$51
  Bottom 0.406: R23.2 36.83,93.98 31.75,93.98 31.75,81.28 E2.2 36.83,76.2 36.83,46.99 Q12.3
N$52
  Bottom 0.406: U$1.P2 19.99,13.64 20.32,13.97 20.31,21.58 R26.2
N$53
  Bottom 0.406: E3.11 24.13,72.39 24.13,66.04 25.4,64.77 25.4,55.88 21.59,50.8 21.59,26.67 16.51,21.59 16.51,13.97 U$1.R2
N$54
  Bottom 0.406: R25.2 24.13,80.01 E3.12 22.86,73.66 22.86,64.77 24.13,63.5 24.13,57.15 Q13.3
N$55
  Bottom 0.406: U$1.S2 13.66,13.67 13.97,13.97 13.98,21.6 R28.2
N$56
  Bottom 0.406: U$1.T2 10.16,21.59 13.97,25.4 13.97,55.88 10.16,59.69 15.24,64.77 15.24,74.93 E3.3
N$57
  Bottom 0.406: U$1.U2 7.26,13.61 7.62,13.97 7.58,21.55 R30.2
N$58
  Top 0.406: R26.1 24.13,35.56 24.13,43.18 Q13.1
N$59
  Bottom 0.406: R28.1 Q14.1
N$60
  Top 0.406: Q14.3 19.05,43.18 19.05,48.26 21.59,50.8 21.59,77.47 E3.2
  Bottom 0.406: E3.2 20.32,81.28 20.32,83.82 17.78,85.73 R27.2
N$61
  Bottom 0.406: E4.6 3.81,68.58 3.81,13.97 U$1.V2
N$62
  Top 0.406: D1.C D2.A
N$63
  Bottom 0.406: R29.2 10.16,95.25 2.54,95.25 2.54,74.93 E4.5 7.62,69.85 7.62,54.61 Q15.3
N$64
  Bottom 0.406: R30.1 7.62,36.83 7.62,44.45 Q15.1
N$65
  Top 0.406: D3.C 26.67,106.68 29.21,106.68 R35.2
N$66
  Bottom 0.813: D5.C D6.A
N$67
  Bottom 0.813: D6.C D7.A
N$68
  Bottom 0.406: R31.2 Q16.2
N$69
  Bottom 0.406: Q16.3 12.7,107.95 Q17.2 25.4,107.95 R34.2
N$70
  Bottom 0.813: D4.C D5.A 36.83,118.11 20.32,118.11 Q17.1
N$71
  Top 0.406: R36.2 154.94,87.63 C9.1 154.94,81.28 154.94,67.31 157.48,64.77 157.48,60.96 E5.13
N$72
  Bottom 0.406: R37.2 R36.1 157.48,95.25 C9.2 154.94,86.36 154.94,77.47 Q18.2
N$73
  Bottom 0.813: E5.2 E5.3 E5.4
N$74
  Top 0.406: R38.2 151.13,86.36 C10.1 152.4,67.31 153.67,66.04 154.94,66.04 156.21,64.77 156.21,62.23 E5.1
N$75
  Top 0.406: C10.2 153.67,87.63 Q19.2
  Bottom 0.406: R39.2 R38.1 152.4,96.52 C10.2
N$76
  Top 0.406: E5.5 E5.8
  Bottom 0.406: U$4.M2 153.67,8.89 153.67,13.97 149.86,19.05 149.86,45.72 E5.5
N$77
  Bottom 0.406: U$4.K2 160.02,10.16 160.02,15.24 162.56,17.78 162.56,45.72 E5.9
N$78
  Bottom 0.406: U$4.L2 156.21,8.89 156.21,15.24 154.94,16.51 153.67,16.51 151.13,19.05 151.13,44.45 E5.6
N$79
  Bottom 0.406: U$4.P2 147.32,8.89 147.32,62.23 152.4,69.85 152.4,73.66 Q19.3
N$80
  Bottom 0.406: U$4.N2 149.86,8.89 149.86,13.97 148.59,19.05 148.59,60.96 156.21,68.58 Q18.3
N$81
  Bottom 0.813: E6.10 E6.5 E6.6
N$82
  Top 0.406: R40.2 177.8,86.36 C7.1
  Bottom 0.406: C7.1 179.07,78.74 180.34,77.47 180.34,71.12 175.26,64.77 172.72,59.69 172.72,38.1 171.45,36.83 170.18,36.83 168.91,35.56 168.91,27.94 E6.4
N$83
  Top 0.406: C7.2 180.34,87.63 Q20.2
  Bottom 0.406: R41.2 R40.1 179.07,93.98 C7.2
N$84
  Bottom 0.813: E6.3 E6.2 E6.13
N$85
  Top 0.406: R42.2 181.61,87.63 C8.1
  Bottom 0.406: C8.1 182.88,80.01 181.61,78.74 181.61,69.85 182.88,68.58 182.88,67.31 181.61,66.04 177.8,66.04 173.99,59.69 173.99,36.83 171.45,34.29 E6.1
N$86
  Top 0.406: C8.2 185.42,87.63 185.42,82.55 180.34,77.47 Q21.2
  Bottom 0.406: C8.2 184.15,93.98 R42.1 R43.2
N$87
  Top 0.406: U$4.C1 179.07,8.89 179.07,17.78 E6.8 176.53,20.32 176.53,27.94 E6.12
N$88
  Top 0.406: U$4.B1 181.61,8.89 181.61,17.78 E6.9
N$89
  Top 0.406: U$4.A1 185.42,8.89 185.42,17.78 E6.11
N$90
  Top 0.406: U$4.D1 175.26,8.89 175.26,34.29 180.34,39.37 180.34,63.5 182.88,66.04 Q21.3
N$91
  Top 0.406: U$4.E1 172.72,8.89 172.72,33.02 179.07,39.37 179.07,76.2 Q20.3
N$92
  Bottom 0.813: E7.12 E7.11 E7.10
N$93
  Top 0.406: R44.2 172.72,86.36 C11.1 172.72,81.28 172.72,67.31 175.26,64.77 175.26,59.69 E7.13
N$94
  Bottom 0.406: R45.2 R44.1 175.26,95.25 C11.2 172.72,86.36 172.72,77.47 Q22.2
N$95
  Bottom 0.813: E7.2 E7.3 E7.4
N$96
  Top 0.406: R46.2 168.91,86.36 C12.1 170.18,67.31 171.45,66.04 172.72,66.04 173.99,64.77 173.99,62.23 171.45,59.69 E7.1
N$97
  Top 0.406: C12.2 171.45,87.63 Q23.2
  Bottom 0.406: R47.2 R46.1 170.18,95.25 C12.2
N$98
  Top 0.406: E7.5 E7.8
  Bottom 0.406: U$4.F2 168.91,10.16 168.91,13.97 166.37,19.05 166.37,45.72 E7.5
N$99
  Bottom 0.406: E7.9 179.07,46.99 180.34,45.72 180.34,20.32 179.07,17.78 177.8,17.78 175.26,15.24 175.26,8.89 U$4.D2
N$100
  Bottom 0.406: U$4.E2 172.72,8.89 172.72,13.97 167.64,19.05 167.64,44.45 E7.6
N$101
  Bottom 0.406: U$4.J2 162.56,8.89 162.56,13.97 163.83,16.51 163.83,48.26 166.37,50.8 166.37,64.77 170.18,69.85 170.18,73.66 Q23.3
N$102
  Bottom 0.406: U$4.H2 166.37,8.89 166.37,13.97 165.1,17.78 165.1,46.99 167.64,49.53 167.64,63.5 170.18,66.04 171.45,66.04 173.99,68.58 Q22.3
N$103
  Bottom 0.813: E8.6 E8.5 E8.10
N$104
  Top 0.406: R48.2 160.02,86.36 C16.1
  Bottom 0.406: E8.4 152.4,27.94 152.4,35.56 153.67,36.83 154.94,36.83 156.21,38.1 156.21,62.23 161.29,69.85 C16.1
N$105
  Top 0.406: C16.2 162.56,87.63 Q24.2
  Bottom 0.406: R49.2 R48.1 161.29,95.25 C16.2
N$106
  Bottom 0.813: E8.3 E8.2 E8.13
N$107
  Top 0.406: R50.2 163.83,87.63 C17.1
  Bottom 0.406: E8.1 156.21,34.29 157.48,35.56 157.48,62.23 160.02,66.04 163.83,66.04 165.1,67.31 165.1,68.58 162.56,72.39 162.56,76.2 166.37,82.55 C17.1
N$108
  Top 0.406: Q25.2 162.56,77.47 167.64,82.55 167.64,87.63 C17.2
  Bottom 0.406: C17.2 166.37,95.25 R50.1 R51.2
N$109
  Top 0.406: U$4.J1 162.56,8.89 162.56,17.78 E8.8 160.02,20.32 160.02,27.94 E8.12
N$110
  Top 0.406: U$4.H1 166.37,8.89 166.37,16.51 E8.9
N$111
  Top 0.406: U$4.F1 168.91,16.51 168.91,17.78 E8.11
N$112
  Top 0.406: U$4.K1 160.02,8.89 160.02,13.97 158.75,15.24 158.75,34.29 165.1,40.64 Q25.3
N$113
  Top 0.406: U$4.L1 156.21,8.89 156.21,33.02 162.56,39.37 162.56,64.77 161.29,66.04 161.29,76.2 Q24.3
N$114
  Bottom 0.813: E9.6 E9.5 E9.10
N$115
  Top 0.406: R52.2 142.24,86.36 C18.1
  Bottom 0.406: E9.4 135.89,27.94 135.89,35.56 137.16,36.83 138.43,36.83 139.7,38.1 139.7,63.5 143.51,69.85 143.51,78.74 142.24,80.01 142.24,81.28 C18.1
N$116
  Top 0.406: C18.2 144.78,87.63 Q26.2
  Bottom 0.406: R53.2 R52.1 143.51,95.25 C18.2
N$117
  Bottom 0.813: E9.3 E9.2 E9.13
N$118
  Top 0.406: R54.2 146.05,87.63 C19.1
  Bottom 0.406: E9.1 140.97,38.1 140.97,63.5 143.51,66.04 146.05,66.04 147.32,67.31 147.32,68.58 144.78,72.39 144.78,77.47 147.32,80.01 C19.1
N$119
  Top 0.406: C19.2 149.86,87.63 149.86,82.55 144.78,77.47 Q27.2
  Bottom 0.406: R55.2 R54.1 148.59,95.25 C19.2
N$120
  Top 0.406: U$4.P1 147.32,8.89 147.32,16.51 E9.8 143.51,20.32 143.51,27.94 E9.12
N$121
  Top 0.406: U$4.N1 149.86,8.89 149.86,16.51 E9.9
N$122
  Top 0.406: U$4.M1 153.67,8.89 153.67,16.51 E9.11
N$123
  Top 0.406: U$4.R1 143.51,8.89 143.51,13.97 142.24,16.51 142.24,40.64 147.32,41.91 Q27.3
N$124
  Top 0.406: U$4.S1 140.97,8.89 140.97,41.91 146.05,43.18 146.05,64.77 143.51,67.31 143.51,76.2 Q26.3
N$125
  Bottom 0.813: E10.12 E10.11 E10.10
N$126
  Top 0.406: R56.2 137.16,87.63 C20.1 137.16,81.28 137.16,68.58 140.97,64.77 140.97,60.96 E10.13
N$127
  Bottom 0.406: R57.2 R56.1 139.7,95.25 C20.2 138.43,87.63 138.43,80.01 135.89,77.47 Q28.2
N$128
  Bottom 0.813: E10.2 E10.3 E10.4
N$129
  Top 0.406: R58.2 133.35,86.36 C21.1 134.62,67.31 135.89,66.04 138.43,66.04 139.7,64.77 139.7,62.23 E10.1
N$130
  Bottom 0.406: R59.2 R58.1 134.62,95.25 C21.2 133.35,87.63 133.35,82.55 Q29.2
N$131
  Top 0.406: E10.5 E10.8
  Bottom 0.406: U$4.T2 137.16,8.89 137.16,15.24 133.35,19.05 133.35,45.72 E10.5
N$132
  Bottom 0.406: U$4.R2 143.51,10.16 143.51,13.97 146.05,17.78 146.05,45.72 E10.9
N$133
  Bottom 0.406: U$4.S2 140.97,8.89 140.97,15.24 138.43,17.78 135.89,17.78 134.62,19.05 134.62,44.45 E10.6
N$134
  Bottom 0.406: U$4.V2 130.81,8.89 130.81,73.66 Q29.3
N$135
  Bottom 0.406: U$4.U2 134.62,8.89 134.62,13.97 132.08,17.78 132.08,45.72 133.35,52.07 133.35,62.23 138.43,68.58 Q28.3
N$136
  Bottom 0.406: E12.8 111.76,44.45 111.76,62.23 109.22,64.77 106.68,64.77 E11.10
N$137
  Bottom 0.406: E11.1 E11.2 90.17,82.55 95.25,69.85 E11.8
N$138  (via drill 0.81)
  Top 0.406: v82.55,77.47 E11.3
  Bottom 0.406: R63.1 v82.55,77.47
N$139
  Bottom 0.406: Q30.2 R63.2
N$140
  Bottom 0.406: R65.1 R64.2
P2  (via drill 0.81)
  Top 0.406: v83.82,97.79 E15.5 | v81.28,80.01 81.28,63.5 88.9,55.88 88.9,52.07 86.36,52.07 85.09,50.8 85.09,44.45 80.01,39.37 80.01,22.86 D22.C
  Bottom 0.406: U$8.P2 83.82,13.97 83.82,15.24 81.28,16.51 D22.C | v83.82,97.79 83.82,82.55 v81.28,80.01
R2  (via drill 0.81)
  Top 0.406: D21.C 77.47,27.94 77.47,38.1 83.82,44.45 83.82,50.8 85.09,53.34 87.63,53.34 87.63,55.88 80.01,63.5 80.01,87.63 88.9,87.63 91.44,90.17 99.06,90.17 v104.14,95.25
  Bottom 0.406: U$8.R2 80.01,13.97 80.01,15.24 78.74,17.78 D21.C | v104.14,95.25 E14.5
S2  (via drill 0.81)
  Top 0.406: D20.C 74.93,22.86 74.93,40.64 78.74,44.45 83.82,54.61 78.74,59.69 v78.74,86.36 | v81.28,86.36 100.33,86.36 101.6,85.09 101.6,80.01 E13.5
  Bottom 0.406: U$8.S2 77.47,13.97 76.2,16.51 D20.C | v78.74,86.36 v81.28,86.36
U2
  Bottom 0.406: U$8.U2 71.12,13.97 69.85,15.24 69.85,39.37 72.39,41.91 76.2,41.91 78.74,44.45 78.74,49.53 81.28,52.07 88.9,52.07 91.44,49.53 R62.1 97.79,50.8 97.79,71.12 E11.9
V2  (via drill 0.81)
  Top 0.406: E15.4 v83.82,100.33 83.82,110.49 99.06,110.49 v101.6,107.95 | E14.4 105.41,99.06 105.41,78.74 E13.4
  Bottom 0.406: U$8.V2 67.31,13.97 68.58,15.24 68.58,41.91 R64.1 D23.A Q30.3 68.58,85.09 v83.82,100.33 | E14.4 101.6,105.41 v101.6,107.95
VCC
  Top 0.813: 11.43,88.9 C4.1 | 11.43,88.9 25.4,88.9 | 25.4,88.9 C3.1 | C2.1 39.37,88.9 25.4,88.9 | D1.A 58.42,110.49 58.42,100.33 2.54,100.33 2.54,88.9 11.43,88.9
  Bottom 0.813: E1.14 C1.1 52.07,88.9 41.91,88.9 C2.1 E2.14 | C3.1 E3.14 | C4.1 E4.14 | U$1.A2 58.42,13.97 58.42,16.51 60.96,19.05 60.96,115.57 D1.A
VCC1
  Top 0.813: E8.14 168.91,41.91 173.99,41.91 C13.1 | C15.1 147.32,39.37 149.86,41.91 157.48,41.91 C14.1
  Bottom 0.813: U$4.A2 185.02,8.49 185.42,8.89 185.42,16.51 187.96,21.59 187.96,29.21 C25.1 181.61,36.83 181.61,60.96 179.07,63.5 C22.1 E7.14 175.26,57.15 175.26,41.91 C13.1 E6.14 | E8.14 C14.1 158.75,40.64 158.75,57.15 E5.14 C23.1 | E9.14 C15.1 142.24,40.64 142.24,57.15 E10.14 C24.1
VCC3
  Top 0.813: R65.2 71.12,62.23 68.58,64.77 68.58,105.41 78.74,115.57 81.28,115.57 | 81.28,115.57 91.44,115.57 C31.1 | C30.1 81.28,95.25 81.28,115.57
  Bottom 0.813: U$8.A2 121.92,13.97 120.65,50.8 E12.14 C27.1 C28.1 111.76,67.31 111.76,85.09 | 111.76,85.09 E13.14 | 111.76,88.9 C29.1 | 111.76,85.09 111.76,88.9 | 111.76,107.95 E14.14 | 111.76,88.9 111.76,107.95 | 111.76,107.95 107.95,111.76 C31.1 E15.14 | R65.2 R67.2 | C30.1 E11.14

## Text on the board
Top: FLIP CHIP | FLIP CHIP
Bottom: M100A | DEVICE SELECTOR M103B | NEG. BUS DRIVER M633B | BUS DATA INTERFACE